# EAGLE board LilyPad-Dev-Simple-Panel-v12 (EAGLE 7.3.0), part 1 of 2
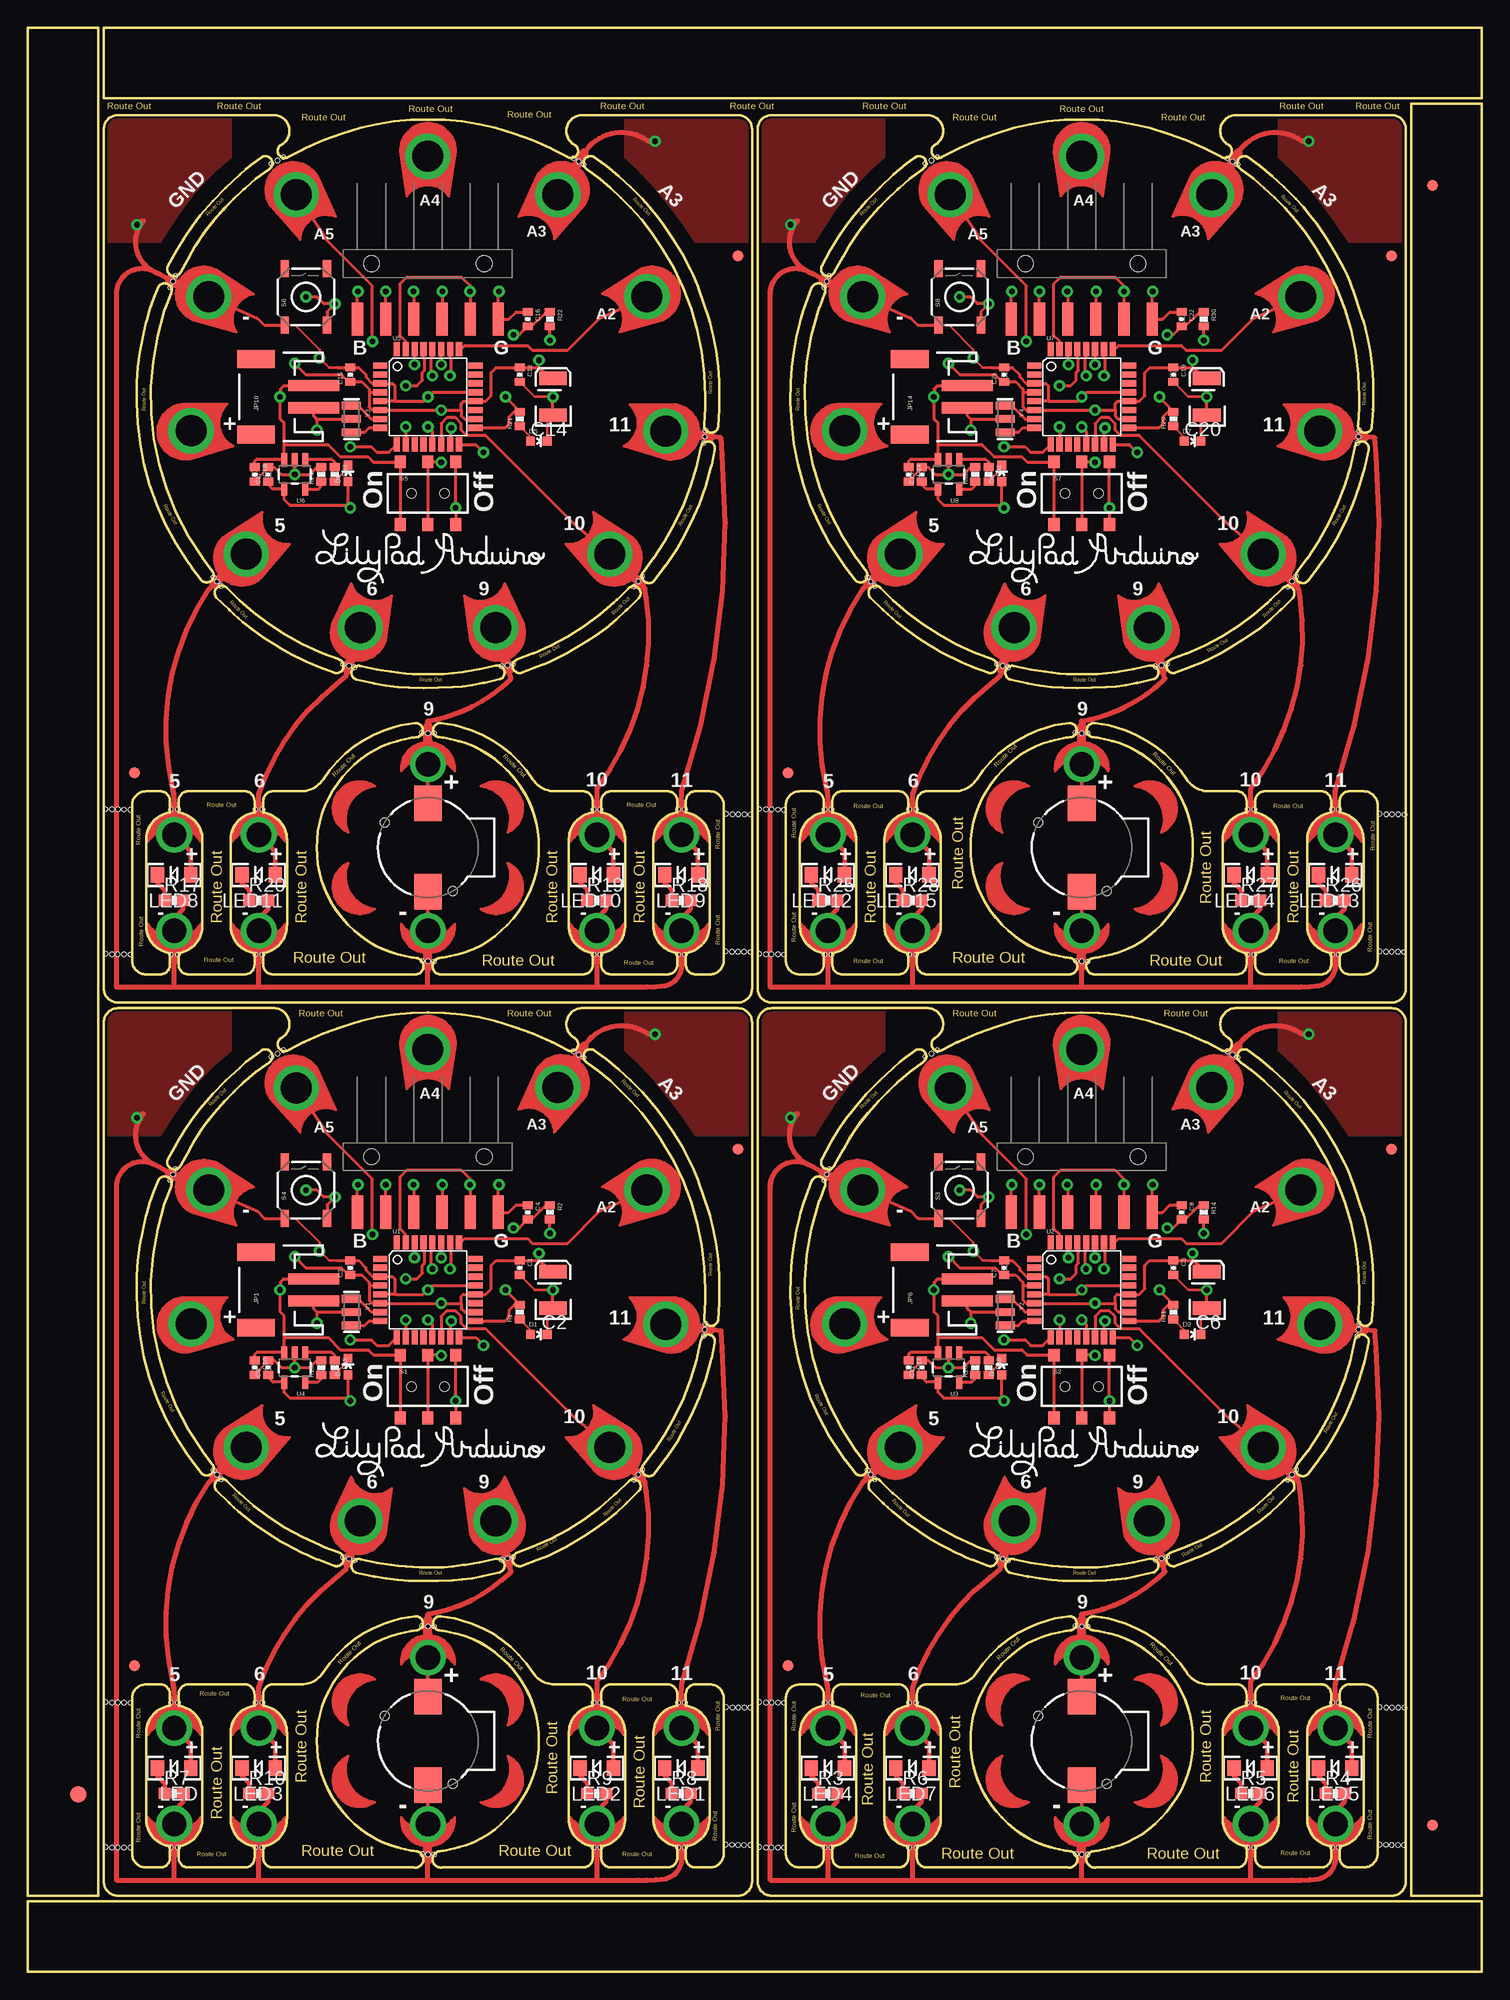
[diagram p0: board, top side]
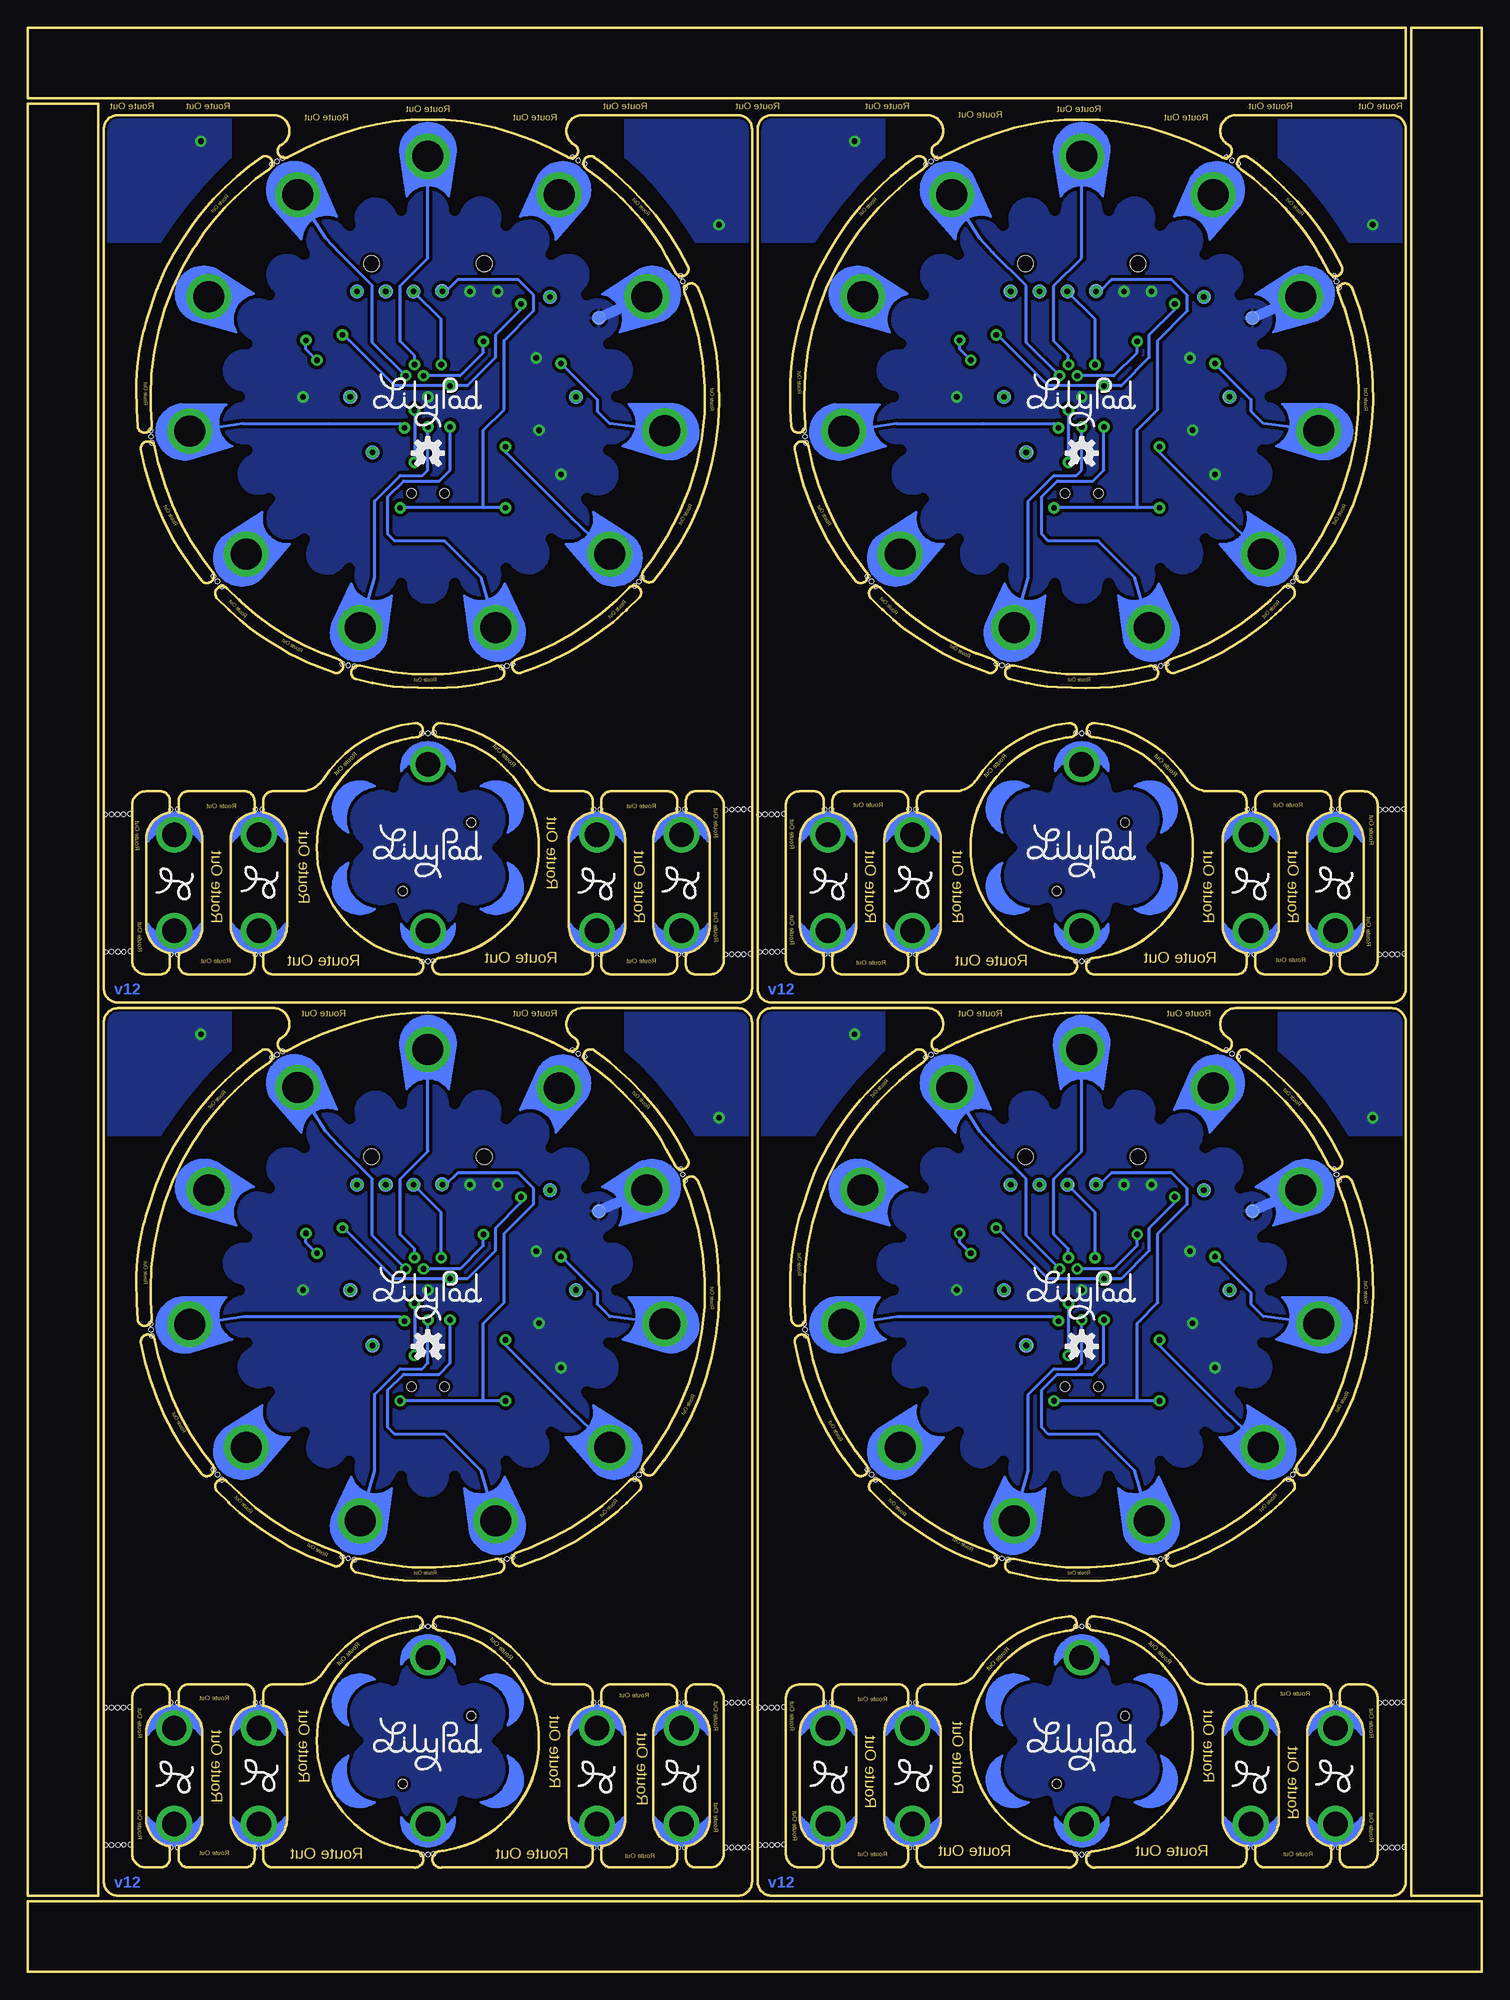
[diagram p1: board, bottom side, seen from below]

Size 131.06 x 175.26 mm. Coordinates in mm from the lower left corner, seen from the top.
Outline: 1254 segments
Copper layers (1*16): Top 0.035mm / dielectric 1.5mm / Bottom 0.035mm
Design rules "default": minimum track width 8mil, minimum drill 20mil, track to track 8mil, track to pad 8mil, pad to pad 8mil, via to via 8mil, smd to smd 8mil, copper to edge 8mil, drill to drill 8mil, minimum pad ring 12mil, minimum via ring 10mil, stop-mask expansion 4mil, vias tented up to drill 20mil, thermal gap 10mil
Net classes: 1 VCC: width 0.203 mm
Holes 0.38 mm at 13.09,71.87 13.31,72.38 12.87,71.34 49.66,82.68 50.12,82.42 49.18,82.98 61.02,57.88 61.08,58.44 60.92,57.32 55.03,44.82 55.38,45.27 54.64,44.36 43.25,37.27 43.76,37.41 42.7,37.16 28.94,37.23 29.44,37.08 28.42,37.37 17.05,44.81 17.42,44.42 16.75,45.21 36.07,31.14 36.61,31.15 35.51,31.17 36.07,10.58 36.6,10.56 35.55,10.6 9.24,24.25 8.69,24.26 8.12,24.27 7.6,24.27 7.01,24.31 9.23,11.19 8.68,11.2 8.12,11.21 7.6,11.21 7.01,11.24 65.15,23.81 64.6,23.82 64.03,23.83 63.52,23.83 62.92,23.86 65.12,11.42 64.57,11.43 64.01,11.44 63.49,11.44 62.89,11.47 22.51,82.77 23.05,83.07 21.96,82.48 13.53,24.27 12.89,24.27 21.15,24.27 20.51,24.27 51.63,24.27 50.99,24.27 59.25,24.27 58.61,24.27 13.53,11.19 12.89,11.19 21.15,11.19 20.51,11.19 51.63,11.19 50.99,11.19 59.25,11.19 58.61,11.19 72.02,71.87 72.24,72.38 71.8,71.34 108.58,82.68 109.05,82.42 108.11,82.98 119.95,57.88 120,58.44 119.85,57.32 113.95,44.82 114.31,45.27 113.57,44.36 102.18,37.27 102.69,37.41 101.63,37.16 87.87,37.23 88.37,37.08 87.35,37.37 75.98,44.81 76.35,44.42 75.68,45.21 94.99,31.14 95.54,31.15 94.44,31.17 95,10.58 95.53,10.56 94.48,10.6 68.17,24.25 67.62,24.26 67.05,24.27 66.53,24.27 65.94,24.31 68.16,11.19 67.61,11.2 67.05,11.21 66.53,11.21 65.93,11.24 124.08,23.81 123.53,23.82 122.96,23.83 122.44,23.83 121.85,23.86 124.05,11.42 123.5,11.43 122.93,11.44 122.42,11.44 121.82,11.47 81.44,82.77 81.98,83.07 80.89,82.48 72.46,24.27 71.82,24.27 80.08,24.27 79.44,24.27 110.56,24.27 109.92,24.27 118.18,24.27 117.54,24.27 72.46,11.19 71.82,11.19 80.08,11.19 79.44,11.19 110.56,11.19 109.92,11.19 118.18,11.19 117.54,11.19 13.09,152.39 13.31,152.9 12.87,151.86 49.66,163.2 50.12,162.94 49.18,163.5 61.02,138.4 61.08,138.95 60.92,137.84 55.03,125.34 55.38,125.79 54.64,124.88 43.25,117.79 43.76,117.93 42.7,117.68 28.94,117.75 29.44,117.6 28.42,117.89 17.05,125.33 17.42,124.94 16.75,125.73 36.07,111.66 36.61,111.67 35.51,111.68 36.07,91.1 36.6,91.08 35.55,91.12 9.24,104.77 8.69,104.78 8.12,104.79 7.6,104.79 7.01,104.82 9.23,91.71 8.68,91.72 8.12,91.72 7.6,91.73 7.01,91.76 65.15,104.33 64.6,104.34 64.03,104.34 63.52,104.35 62.92,104.38 65.12,91.94 64.57,91.95 64.01,91.95 63.49,91.96 62.89,91.99 22.51,163.29 23.05,163.59 21.96,163 13.53,104.79 12.89,104.79 21.15,104.79 20.51,104.79 51.63,104.79 50.99,104.79 59.25,104.79 58.61,104.79 13.53,91.7 12.89,91.7 21.15,91.7 20.51,91.7 51.63,91.7 50.99,91.7 59.25,91.7 58.61,91.7 72.02,152.39 72.24,152.9 71.8,151.86 108.58,163.2 109.05,162.94 108.11,163.5 119.95,138.4 120,138.95 119.85,137.84 113.95,125.34 114.31,125.79 113.57,124.88 102.18,117.79 102.69,117.93 101.63,117.68 87.87,117.75 88.37,117.6 87.35,117.89 75.98,125.33 76.35,124.94 75.68,125.73 94.99,111.66 95.54,111.67 94.44,111.68 95,91.1 95.53,91.08 94.48,91.12 68.17,104.77 67.62,104.78 67.05,104.79 66.53,104.79 65.94,104.82 68.16,91.71 67.61,91.72 67.05,91.72 66.53,91.73 65.93,91.76 124.08,104.33 123.53,104.34 122.96,104.34 122.44,104.35 121.85,104.38 124.05,91.94 123.5,91.95 122.93,91.95 122.42,91.96 121.82,91.99 81.44,163.29 81.98,163.59 80.89,163 72.46,104.79 71.82,104.79 80.08,104.79 79.44,104.79 110.56,104.79 109.92,104.79 118.18,104.79 117.54,104.79 72.46,91.7 71.82,91.7 80.08,91.7 79.44,91.7 110.56,91.7 109.92,91.7 118.18,91.7 117.54,91.7
bRestrict: area 13.5,38.9 to 58.6,84; area 32.1,79.3 to 34.6,80.5; area 42.7,77.8 to 45.5,79.5; area 47.4,74.9 to 50,77.2; area 51.1,70.6 to 53.1,73.4; area 53.3,65.7 to 54.7,68.3; area 53.9,60.4 to 55.1,62.7; area 53.3,54.7 to 54.8,57.4; area 47.4,45.9 to 50.1,48.2; area 42.8,43.5 to 45.6,45.2; area 37.6,42.5 to 40,43.8; area 32.2,42.5 to 34.7,43.8; 80 more areas; 88 lines

## Footprints (pad centres in the part's own frame; a part is rotated, then mirrored left to right if it is on the bottom)
PETAL-LONG-1-2SIDE = drill 2.794 pad 4.064: 1 0.03,0
BUZZER-CCV = smd 3.2 x 2.5: + 4,0; - -4,0 | hole 0.8: -3.9,-2.25; 2.25,3.9
0402-CAP = smd 0.7 x 0.9: 1 -0.65,0; 2 0.65,0
EIA3528 = smd 1.2 x 2.5: A 1.65,0; C -1.65,0
LED-0603 = smd 0.8 x 0.8: A 0,-0.75; C 0,0.75
FIDUCIAL-1.5X3 = smd 1.5 x 1.5: 1 0,0
FIDUCIAL-1X2 = smd 1 x 1: 1 0,0
JST-2-SMD = smd 1 x 4.6: 1 -1,-3.7; 2 1,-3.7 | smd 1.6 x 3.4: NC1 -3.4,1.5; NC2 3.4,1.5
1X06-SMD = smd 1 x 3: 1 -6.35,5; 2 -3.81,5; 3 -1.27,5; 4 1.27,5; 5 3.81,5; 6 6.35,5 | hole 1.4: -5.08,0; 5.08,0
LED-1206 = smd 1.2 x 1.4: A -1.5,0; C 1.5,0
PETAL-SMALL-2SIDE = drill 2.2: 1 0,0
PAD.03X.05 = smd 1.27 x 1.27: P$1 0,0
0402-RES = smd 0.7 x 0.9: 1 -0.65,0; 2 0.65,0
0603-RES = smd 1.1 x 1: 1 -0.85,0; 2 0.85,0
AYZ0202 = smd 1 x 1.15: 1 -2.5,2.825; 2 0,2.825; 3 2.5,2.825; 4 -2.5,-2.825; 5 0,-2.825; 6 2.5,-2.825 | hole 0.85: 1.5,0; -1.5,0
TACTILE_SWITCH_SMD = smd 1.524 x 0.762: 1 -2.54,1.905; 2 2.54,1.905; 3 -2.54,-1.905; 4 2.54,-1.905
TQFP32-08 = smd 1.27 x 0.559: 1 -4.293,2.8; 2 -4.293,2; 3 -4.293,1.2; 4 -4.293,0.4; 5 -4.293,-0.4; 6 -4.293,-1.2; 7 -4.293,-2; 8 -4.293,-2.8; 17 4.293,-2.8; 18 4.293,-2; 19 4.293,-1.2; 20 4.293,-0.4; 21 4.293,0.4; 22 4.293,1.2; 23 4.293,2; 24 4.293,2.8 | smd 0.559 x 1.27: 9 -2.8,-4.293; 10 -2,-4.293; 11 -1.2,-4.293; 12 -0.4,-4.293; 13 0.4,-4.293; 14 1.2,-4.293; 15 2,-4.293; 16 2.8,-4.293; 25 2.8,4.293; 26 2,4.293; 27 1.2,4.293; 28 0.4,4.293; 29 -0.4,4.293; 30 -1.2,4.293; 31 -2,4.293; 32 -2.8,4.293
SOT23-5 = smd 0.55 x 1.2: 1 -0.95,-1.3; 2 0,-1.3; 3 0.95,-1.3; 4 0.95,1.3; 5 -0.95,1.3
RESONATOR-SMD = smd 0.7 x 1.7: 1 -1.2,0; 2 0,0; 3 1.2,0

## Placement (x,y rotation side)
1  SEWTAP-NOHOLE2  [PETAL-NOHOLE-2SIDE]  29.57,17.08 300 top
2  SEWTAP-NOHOLE2  [PETAL-NOHOLE-2SIDE]  29.57,24.58 240 top
3  SEWTAP-NOHOLE2  [PETAL-NOHOLE-2SIDE]  42.56,24.58 120 top
4  SEWTAP-NOHOLE2  [PETAL-NOHOLE-2SIDE]  42.57,17.07 60 top
5  SEWTAP-NOHOLE2  [PETAL-NOHOLE-2SIDE]  88.5,24.58 240 top
6  SEWTAP-NOHOLE2  [PETAL-NOHOLE-2SIDE]  101.49,24.58 120 top
7  SEWTAP-NOHOLE2  [PETAL-NOHOLE-2SIDE]  101.49,17.07 60 top
8  SEWTAP-NOHOLE2  [PETAL-NOHOLE-2SIDE]  88.5,17.08 300 top
9  SEWTAP-NOHOLE2  [PETAL-NOHOLE-2SIDE]  29.57,105.1 240 top
10  SEWTAP-NOHOLE2  [PETAL-NOHOLE-2SIDE]  42.56,105.1 120 top
11  SEWTAP-NOHOLE2  [PETAL-NOHOLE-2SIDE]  42.57,97.59 60 top
12  SEWTAP-NOHOLE2  [PETAL-NOHOLE-2SIDE]  29.57,97.6 300 top
13  SEWTAP-NOHOLE2  [PETAL-NOHOLE-2SIDE]  88.5,105.1 240 top
14  SEWTAP-NOHOLE2  [PETAL-NOHOLE-2SIDE]  101.49,105.1 120 top
15  SEWTAP-NOHOLE2  [PETAL-NOHOLE-2SIDE]  101.49,97.59 60 top
16  SEWTAP-NOHOLE2  [PETAL-NOHOLE-2SIDE]  88.5,97.6 300 top
A2/1  SEWTAP9  [PETAL-LONG-1-2SIDE]  114.77,70.51 204.5 top
A2/2  SEWTAP9  [PETAL-LONG-1-2SIDE]  55.84,151.03 204.5 top
A2/3  SEWTAP9  [PETAL-LONG-1-2SIDE]  114.77,151.03 204.5 top
A2/16  SEWTAP9  [PETAL-LONG-1-2SIDE]  55.84,70.51 204.5 top
A3/1  SEWTAP9  [PETAL-LONG-1-2SIDE]  106.74,79.73 237.3 top
A3/2  SEWTAP9  [PETAL-LONG-1-2SIDE]  47.81,160.25 237.3 top
A3/3  SEWTAP9  [PETAL-LONG-1-2SIDE]  106.74,160.25 237.3 top
A3/17  SEWTAP9  [PETAL-LONG-1-2SIDE]  47.81,79.73 237.3 top
A4/1  SEWTAP9  [PETAL-LONG-1-2SIDE]  95,83.17 270 top
A4/2  SEWTAP9  [PETAL-LONG-1-2SIDE]  36.07,163.69 270 top
A4/3  SEWTAP9  [PETAL-LONG-1-2SIDE]  95,163.69 270 top
A4/18  SEWTAP9  [PETAL-LONG-1-2SIDE]  36.07,83.17 270 top
A5/1  SEWTAP9  [PETAL-LONG-1-2SIDE]  83.13,79.7 302.7 top
A5/2  SEWTAP9  [PETAL-LONG-1-2SIDE]  24.2,160.22 302.7 top
A5/3  SEWTAP9  [PETAL-LONG-1-2SIDE]  83.13,160.22 302.7 top
A5/19  SEWTAP9  [PETAL-LONG-1-2SIDE]  24.2,79.7 302.7 top
B1  Buzzer  [BUZZER-CCV]  36.07,20.83 90 top
B2  Buzzer  [BUZZER-CCV]  95,20.83 90 top
B3  Buzzer  [BUZZER-CCV]  36.07,101.35 90 top
B4  Buzzer  [BUZZER-CCV]  95,101.35 90 top
C1  0.1uF  [0402-CAP]  44.34,63.47 270 top
C2  47uF  [EIA3528]  47.34,61.47 90 top
C3  1.0uF  [0402-CAP]  29.07,63.47 90 top
C4  0.1uF  [0402-CAP]  45.07,68.47 270 top
C5  0.1uF  [0402-CAP]  103.27,63.47 270 top
C6  47uF  [EIA3528]  106.27,61.47 90 top
C7  1.0uF  [0402-CAP]  88,63.47 90 top
C8  0.1uF  [0402-CAP]  104,68.47 270 top
C9  4.7uF  [0402-CAP]  21.67,54.47 90 top
C10  4.7uF  [0402-CAP]  20.47,54.47 270 top
C11  4.7uF  [0402-CAP]  80.6,54.47 90 top
C12  4.7uF  [0402-CAP]  79.4,54.47 270 top
C13  0.1uF  [0402-CAP]  44.34,143.99 270 top
C14  47uF  [EIA3528]  47.34,141.99 90 top
C15  1.0uF  [0402-CAP]  29.07,143.99 90 top
C16  0.1uF  [0402-CAP]  45.07,148.99 270 top
C17  4.7uF  [0402-CAP]  21.67,134.99 90 top
C18  4.7uF  [0402-CAP]  20.47,134.99 270 top
C19  0.1uF  [0402-CAP]  103.27,143.99 270 top
C20  47uF  [EIA3528]  106.27,141.99 90 top
C21  1.0uF  [0402-CAP]  88,143.99 90 top
C22  0.1uF  [0402-CAP]  104,148.99 270 top
C23  4.7uF  [0402-CAP]  80.6,134.99 90 top
C24  4.7uF  [0402-CAP]  79.4,134.99 270 top
D1  Status  [LED-0603]  46.07,57.47 270 top
D2  Status  [LED-0603]  105,57.47 270 top
D3  Yellow  [LED-0603]  87.8,54.57 0 top
D4  Yellow  [LED-0603]  28.87,54.57 0 top
D5  Status  [LED-0603]  46.07,137.99 270 top
D6  Yellow  [LED-0603]  28.87,135.09 0 top
D7  Status  [LED-0603]  105,137.99 270 top
D8  Yellow  [LED-0603]  87.8,135.09 0 top
E$1  [FIDUCIAL-1.5X3]  4.57,16 0 top
E$4  [FIDUCIAL-1X2]  126.62,13.21 0 top
E$5  [FIDUCIAL-1X2]  126.62,161.04 180 top
JP1  LiPo  [JST-2-SMD]  22.07,61.47 90 top
JP2  [1X06-SMD]  36.07,73.47 180 top
JP3  FIDUCIAL1X2  [FIDUCIAL-1X2]  64.01,74.17 0 top
JP4  FIDUCIAL1X2  [FIDUCIAL-1X2]  9.6,27.58 0 top
JP5  [1X06-SMD]  95,73.47 180 top
JP6  LiPo  [JST-2-SMD]  81,61.47 90 top
JP7  FIDUCIAL1X2  [FIDUCIAL-1X2]  122.94,74.17 0 top
JP8  FIDUCIAL1X2  [FIDUCIAL-1X2]  68.53,27.58 0 top
JP9  [1X06-SMD]  36.07,153.99 180 top
JP10  LiPo  [JST-2-SMD]  22.07,141.99 90 top
JP11  FIDUCIAL1X2  [FIDUCIAL-1X2]  64.01,154.69 0 top
JP12  FIDUCIAL1X2  [FIDUCIAL-1X2]  9.6,108.1 0 top
JP13  [1X06-SMD]  95,153.99 180 top
JP14  LiPo  [JST-2-SMD]  81,141.99 90 top
JP15  FIDUCIAL1X2  [FIDUCIAL-1X2]  122.94,154.69 0 top
JP16  FIDUCIAL1X2  [FIDUCIAL-1X2]  68.53,108.1 0 top
LED  White  [LED-1206]  13.19,18.36 180 top
LED1  White  [LED-1206]  58.91,18.36 180 top
LED2  White  [LED-1206]  51.29,18.36 180 top
LED3  White  [LED-1206]  20.81,18.36 180 top
LED4  White  [LED-1206]  72.12,18.36 180 top
LED5  White  [LED-1206]  117.84,18.36 180 top
LED6  White  [LED-1206]  110.22,18.36 180 top
LED7  White  [LED-1206]  79.74,18.36 180 top
LED8  White  [LED-1206]  13.19,98.88 180 top
LED9  White  [LED-1206]  58.91,98.88 180 top
LED10  White  [LED-1206]  51.29,98.88 180 top
LED11  White  [LED-1206]  20.81,98.88 180 top
LED12  White  [LED-1206]  72.12,98.88 180 top
LED13  White  [LED-1206]  117.84,98.88 180 top
LED14  White  [LED-1206]  110.22,98.88 180 top
LED15  White  [LED-1206]  79.74,98.88 180 top
LED+  SEWTAP6  [PETAL-SMALL-2SIDE]  13.21,21.97 180 top
LED+1  SEWTAP6  [PETAL-SMALL-2SIDE]  58.93,21.97 180 top
LED+2  SEWTAP6  [PETAL-SMALL-2SIDE]  51.31,21.97 180 top
LED+3  SEWTAP6  [PETAL-SMALL-2SIDE]  20.83,21.97 180 top
LED+4  SEWTAP6  [PETAL-SMALL-2SIDE]  72.14,21.97 180 top
LED+5  SEWTAP6  [PETAL-SMALL-2SIDE]  117.86,21.97 180 top
LED+6  SEWTAP6  [PETAL-SMALL-2SIDE]  110.24,21.97 180 top
LED+7  SEWTAP6  [PETAL-SMALL-2SIDE]  79.76,21.97 180 top
LED+8  SEWTAP6  [PETAL-SMALL-2SIDE]  13.21,102.49 180 top
LED+9  SEWTAP6  [PETAL-SMALL-2SIDE]  58.93,102.49 180 top
LED+10  SEWTAP6  [PETAL-SMALL-2SIDE]  51.31,102.49 180 top
LED+11  SEWTAP6  [PETAL-SMALL-2SIDE]  20.83,102.49 180 top
LED+12  SEWTAP6  [PETAL-SMALL-2SIDE]  72.14,102.49 180 top
LED+13  SEWTAP6  [PETAL-SMALL-2SIDE]  117.86,102.49 180 top
LED+14  SEWTAP6  [PETAL-SMALL-2SIDE]  110.24,102.49 180 top
LED+15  SEWTAP6  [PETAL-SMALL-2SIDE]  79.76,102.49 180 top
LED-  SEWTAP6  [PETAL-SMALL-2SIDE]  13.21,13.34 0 top
LED-1  SEWTAP6  [PETAL-SMALL-2SIDE]  58.93,13.34 0 top
LED-2  SEWTAP6  [PETAL-SMALL-2SIDE]  51.31,13.34 0 top
LED-3  SEWTAP6  [PETAL-SMALL-2SIDE]  20.83,13.34 0 top
LED-4  SEWTAP6  [PETAL-SMALL-2SIDE]  72.14,13.34 0 top
LED-5  SEWTAP6  [PETAL-SMALL-2SIDE]  117.86,13.34 0 top
LED-6  SEWTAP6  [PETAL-SMALL-2SIDE]  110.24,13.34 0 top
LED-7  SEWTAP6  [PETAL-SMALL-2SIDE]  79.76,13.34 0 top
LED-8  SEWTAP6  [PETAL-SMALL-2SIDE]  13.21,93.85 0 top
LED-9  SEWTAP6  [PETAL-SMALL-2SIDE]  58.93,93.85 0 top
LED-10  SEWTAP6  [PETAL-SMALL-2SIDE]  51.31,93.85 0 top
LED-11  SEWTAP6  [PETAL-SMALL-2SIDE]  20.83,93.85 0 top
LED-12  SEWTAP6  [PETAL-SMALL-2SIDE]  72.14,93.85 0 top
LED-13  SEWTAP6  [PETAL-SMALL-2SIDE]  117.86,93.85 0 top
LED-14  SEWTAP6  [PETAL-SMALL-2SIDE]  110.24,93.85 0 top
LED-15  SEWTAP6  [PETAL-SMALL-2SIDE]  79.76,93.85 0 top
LOGO  LOGO-LPLPA  [LOGO-LPA]  36.07,47.47 0 top
LOGO1  LOGO-LPL  [LOGO-L]  72.21,17.65 90 bottom
LOGO2  LOGO-LPL  [LOGO-L]  117.81,17.55 90 bottom
LOGO3  LOGO-LPL  [LOGO-L]  13.28,17.65 90 bottom
LOGO4  LOGO-LPL  [LOGO-L]  58.88,17.55 90 bottom
LOGO5  LOGO-LPL  [LOGO-L]  51.23,17.7 90 bottom
LOGO6  LOGO-LPL  [LOGO-L]  20.85,17.55 90 bottom
LOGO7  LOGO-LPL  [LOGO-L]  110.16,17.7 90 bottom
LOGO8  LOGO-LPL  [LOGO-L]  79.78,17.55 90 bottom
LOGO9  LOGO-LPLPA  [LOGO-LPA]  95,47.47 0 top
LOGO10  LOGO-LPL  [LOGO-L]  13.28,98.17 90 bottom
LOGO11  LOGO-LPL  [LOGO-L]  58.88,98.07 90 bottom
LOGO12  LOGO-LPL  [LOGO-L]  51.23,98.22 90 bottom
LOGO13  LOGO-LPL  [LOGO-L]  20.85,98.07 90 bottom
LOGO14  LOGO-LPLPA  [LOGO-LPA]  36.07,127.99 0 top
LOGO15  LOGO-LPL  [LOGO-L]  72.21,98.17 90 bottom
LOGO16  LOGO-LPL  [LOGO-L]  117.81,98.07 90 bottom
LOGO17  LOGO-LPL  [LOGO-L]  110.16,98.22 90 bottom
LOGO18  LOGO-LPL  [LOGO-L]  79.78,98.07 90 bottom
LOGO19  LOGO-LPLPA  [LOGO-LPA]  95,127.99 0 top
PP-GND  [PAD.03X.05]  20.67,68.57 0 bottom
PP-GND1  [PAD.03X.05]  79.6,68.57 0 bottom
PP-GND2  [PAD.03X.05]  20.67,149.09 0 bottom
PP-GND3  [PAD.03X.05]  79.6,149.09 0 bottom
PP-MISO  [PAD.03X.05]  41.07,56.47 0 bottom
PP-MISO1  [PAD.03X.05]  100,56.47 0 bottom
PP-MISO2  [PAD.03X.05]  41.07,136.99 0 bottom
PP-MISO3  [PAD.03X.05]  100,136.99 0 bottom
PP-RST  [PAD.03X.05]  25.07,70.47 0 bottom
PP-RST1  [PAD.03X.05]  84,70.47 0 bottom
PP-RST2  [PAD.03X.05]  25.07,150.99 0 bottom
PP-RST3  [PAD.03X.05]  84,150.99 0 bottom
PP-SCK  [PAD.03X.05]  43.07,61.47 0 bottom
PP-SCK1  [PAD.03X.05]  102,61.47 0 bottom
PP-SCK2  [PAD.03X.05]  43.07,141.99 0 bottom
PP-SCK3  [PAD.03X.05]  102,141.99 0 bottom
R1  330  [0402-RES]  44.34,59.47 90 top
R2  10K  [0402-RES]  47.07,68.47 270 top
R3  100  [0603-RES]  72.12,16.08 0 top
R4  100  [0603-RES]  117.84,16.08 0 top
R5  100  [0603-RES]  110.22,16.08 0 top
R6  100  [0603-RES]  79.74,16.08 0 top
R7  100  [0603-RES]  13.19,16.08 0 top
R8  100  [0603-RES]  58.91,16.08 0 top
R9  100  [0603-RES]  51.29,16.08 0 top
R10  100  [0603-RES]  20.81,16.08 0 top
R11  330  [0402-RES]  103.27,59.47 90 top
R12  330  [0402-RES]  27.67,54.47 270 top
R13  10k  [0402-RES]  26.47,54.47 90 top
R14  10K  [0402-RES]  106,68.47 270 top
R15  330  [0402-RES]  86.6,54.47 270 top
R16  10k  [0402-RES]  85.4,54.47 90 top
R17  100  [0603-RES]  13.19,96.6 0 top
R18  100  [0603-RES]  58.91,96.6 0 top
R19  100  [0603-RES]  51.29,96.6 0 top
R20  100  [0603-RES]  20.81,96.6 0 top
R21  330  [0402-RES]  44.34,139.99 90 top
R22  10K  [0402-RES]  47.07,148.99 270 top
R23  330  [0402-RES]  27.67,134.99 270 top
R24  10k  [0402-RES]  26.47,134.99 90 top
R25  100  [0603-RES]  72.12,96.6 0 top
R26  100  [0603-RES]  117.84,96.6 0 top
R27  100  [0603-RES]  110.22,96.6 0 top
R28  100  [0603-RES]  79.74,96.6 0 top
R29  330  [0402-RES]  103.27,139.99 90 top
R30  10K  [0402-RES]  106,148.99 270 top
R31  330  [0402-RES]  86.6,134.99 270 top
R32  10k  [0402-RES]  85.4,134.99 90 top
S1  On/Off  [AYZ0202]  36.07,52.77 0 top
S2  On/Off  [AYZ0202]  95,52.77 0 top
S3  Reset  [TACTILE_SWITCH_SMD]  84,70.47 90 top
S4  Reset  [TACTILE_SWITCH_SMD]  25.07,70.47 90 top
S5  On/Off  [AYZ0202]  36.07,133.29 0 top
S6  Reset  [TACTILE_SWITCH_SMD]  25.07,150.99 90 top
S7  On/Off  [AYZ0202]  95,133.29 0 top
S8  Reset  [TACTILE_SWITCH_SMD]  84,150.99 90 top
TP1  [PAD.03X.05]  34.8,70.99 0 bottom
TP2  [PAD.03X.05]  22.73,61.47 0 bottom
TP3  [PAD.03X.05]  93.73,70.99 0 bottom
TP4  [PAD.03X.05]  81.66,61.47 0 bottom
TP5  [PAD.03X.05]  34.8,151.51 0 bottom
TP6  [PAD.03X.05]  22.73,141.99 0 bottom
TP7  [PAD.03X.05]  93.73,151.51 0 bottom
TP8  [PAD.03X.05]  81.66,141.99 0 bottom
TP-DTR  [PAD.03X.05]  42.47,70.97 0 bottom
TP-DTR1  [PAD.03X.05]  101.4,70.97 0 bottom
TP-DTR2  [PAD.03X.05]  42.47,151.49 0 bottom
TP-DTR3  [PAD.03X.05]  101.4,151.49 0 bottom
TP-RX  [PAD.03X.05]  37.37,70.97 0 bottom
TP-RX1  [PAD.03X.05]  96.3,70.97 0 bottom
TP-RX2  [PAD.03X.05]  37.37,151.49 0 bottom
TP-RX3  [PAD.03X.05]  96.3,151.49 0 bottom
TP-TX  [PAD.03X.05]  39.87,70.97 90 bottom
TP-TX1  [PAD.03X.05]  98.8,70.97 90 bottom
TP-TX2  [PAD.03X.05]  39.87,151.49 90 bottom
TP-TX3  [PAD.03X.05]  98.8,151.49 90 bottom
U1  ATMEGA328  [TQFP32-08]  36.07,61.47 0 top
U2  ATMEGA328  [TQFP32-08]  95,61.47 0 top
U3  MCP73831  [SOT23-5]  83,54.47 180 top
U4  MCP73831  [SOT23-5]  24.07,54.47 180 top
U5  ATMEGA328  [TQFP32-08]  36.07,141.99 0 top
U6  MCP73831  [SOT23-5]  24.07,134.99 180 top
U7  ATMEGA328  [TQFP32-08]  95,141.99 0 top
U8  MCP73831  [SOT23-5]  83,134.99 180 top
U$1  SEWTAP9  [PETAL-LONG-1-2SIDE]  29.96,40.64 73.7 top
U$2  OSHW-LOGOS  [OSHW-LOGO-S]  36.07,56.39 0 bottom
U$3  LOGO-LPLP  [LOGO-LILYPAD]  95,20.83 0 bottom
U$4  SEWTAP9  [PETAL-LONG-1-2SIDE]  57.55,58.38 171.8 top
U$5  SEWTAP9  [PETAL-LONG-1-2SIDE]  88.89,40.64 73.7 top
U$6  SEWTAP9  [PETAL-LONG-1-2SIDE]  101.11,40.64 106.3 top
U$7  SEWTAP9  [PETAL-LONG-1-2SIDE]  111.4,47.26 139.1 top
U$8  SEWTAP9  [PETAL-LONG-1-2SIDE]  78.6,47.26 40.9 top
U$9  SEWTAP9  [PETAL-LONG-1-2SIDE]  75.23,70.5 335.5 top
U$10  SEWTAP9  [PETAL-LONG-1-2SIDE]  73.61,58.39 8.2 top
U$11  SEWTAP9  [PETAL-LONG-1-2SIDE]  116.48,58.38 171.8 top
U$12  LOGO-LPLP  [LOGO-LILYPAD]  95,61.47 0 bottom
U$13  [LILYPAD-BRD-LAYERS-SMALL]  95,20.83 120 top
U$14  OSHW-LOGOS  [OSHW-LOGO-S]  95,56.39 0 bottom
U$15  LOGO-LPLP  [LOGO-LILYPAD]  36.07,101.35 0 bottom
U$16  SEWTAP9  [PETAL-LONG-1-2SIDE]  29.96,121.16 73.7 top
U$17  SEWTAP9  [PETAL-LONG-1-2SIDE]  42.18,121.16 106.3 top
U$18  SEWTAP9  [PETAL-LONG-1-2SIDE]  52.47,127.78 139.1 top
U$19  SEWTAP9  [PETAL-LONG-1-2SIDE]  19.67,127.78 40.9 top
U$20  SEWTAP9  [PETAL-LONG-1-2SIDE]  16.3,151.02 335.5 top
U$21  LOGO-LPLP  [LOGO-LILYPAD]  36.07,61.47 0 bottom
U$22  SEWTAP9  [PETAL-LONG-1-2SIDE]  14.69,138.91 8.2 top
U$23  SEWTAP9  [PETAL-LONG-1-2SIDE]  57.55,138.9 171.8 top
U$24  LOGO-LPLP  [LOGO-LILYPAD]  36.07,141.99 0 bottom
U$25  [LILYPAD-BRD-LAYERS-SMALL]  36.07,101.35 120 top
U$26  OSHW-LOGOS  [OSHW-LOGO-S]  36.07,136.91 0 bottom
U$27  LOGO-LPLP  [LOGO-LILYPAD]  95,101.35 0 bottom
U$28  SEWTAP9  [PETAL-LONG-1-2SIDE]  88.89,121.16 73.7 top
U$29  SEWTAP9  [PETAL-LONG-1-2SIDE]  101.11,121.16 106.3 top
U$30  SEWTAP9  [PETAL-LONG-1-2SIDE]  111.4,127.78 139.1 top
U$31  SEWTAP9  [PETAL-LONG-1-2SIDE]  78.6,127.78 40.9 top
U$32  SEWTAP9  [PETAL-LONG-1-2SIDE]  75.23,151.02 335.5 top
U$32-  SEWTAP6  [PETAL-SMALL-2SIDE]  36.07,13.32 0 top
U$32-1  SEWTAP6  [PETAL-SMALL-2SIDE]  95,13.32 0 top
U$32-2  SEWTAP6  [PETAL-SMALL-2SIDE]  36.07,93.84 0 top
U$32-3  SEWTAP6  [PETAL-SMALL-2SIDE]  95,93.84 0 top
U$33  SEWTAP9  [PETAL-LONG-1-2SIDE]  73.61,138.91 8.2 top
U$33+  SEWTAP6  [PETAL-SMALL-2SIDE]  36.07,28.32 180 top
U$33+1  SEWTAP6  [PETAL-SMALL-2SIDE]  95,28.32 180 top
U$33+2  SEWTAP6  [PETAL-SMALL-2SIDE]  36.07,108.84 180 top
U$33+3  SEWTAP6  [PETAL-SMALL-2SIDE]  95,108.84 180 top
U$34  SEWTAP9  [PETAL-LONG-1-2SIDE]  116.48,138.9 171.8 top
U$35  LOGO-LPLP  [LOGO-LILYPAD]  36.07,20.83 0 bottom
U$36  [LILYPAD-BRD-LAYERS-SMALL]  36.07,20.83 120 top
U$37  SEWTAP9  [PETAL-LONG-1-2SIDE]  42.18,40.64 106.3 top
U$38  LOGO-LPLP  [LOGO-LILYPAD]  95,141.99 0 bottom
U$39  SEWTAP9  [PETAL-LONG-1-2SIDE]  52.47,47.26 139.1 top
U$40  [LILYPAD-BRD-LAYERS-SMALL]  95,101.35 120 top
U$41  SEWTAP9  [PETAL-LONG-1-2SIDE]  19.67,47.26 40.9 top
U$42  OSHW-LOGOS  [OSHW-LOGO-S]  95,136.91 0 bottom
U$43  SEWTAP9  [PETAL-LONG-1-2SIDE]  16.3,70.5 335.5 top
U$45  SEWTAP9  [PETAL-LONG-1-2SIDE]  14.69,58.39 8.2 top
Y1  8MHz  [RESONATOR-SMD]  29.17,59.47 270 top
Y2  8MHz  [RESONATOR-SMD]  88.1,59.47 270 top
Y3  8MHz  [RESONATOR-SMD]  29.17,139.99 270 top
Y4  8MHz  [RESONATOR-SMD]  88.1,139.99 270 top

## Library data of the parts
1-16 A2/1-A2/3 A2/16 A3/1-A3/3 A3/17 A4/1-A4/3 A4/18 A5/1-A5/3 A5/19 LED+ LED+1-LED+15 LED- LED-1-LED-15 LOGO LOGO1-LOGO19 U$1 U$3-U$12 U$15-U$24 U$27-U$32 U$32- U$32-1-U$32-3 U$33 U$33+ U$33+1-U$33+3 U$34 U$35 U$37-U$39 U$41 U$43 U$45 = LilyPad-Wearables
B1-B4 C1-C24 D1-D8 JP1-JP16 PP-GND PP-GND1-PP-GND3 PP-MISO PP-MISO1-PP-MISO3 PP-RST PP-RST1-PP-RST3 PP-SCK PP-SCK1-PP-SCK3 R1-R32 S1-S8 TP1-TP8 TP-DTR TP-DTR1-TP-DTR3 TP-RX TP-RX1-TP-RX3 TP-TX TP-TX1-TP-TX3 U1-U8 U$2 U$14 U$26 U$42 Y1-Y4 = SparkFun
E$1 = SparkFun-Retired
E$4 E$5 = SparkFun-Aesthetics
LED LED1-LED15 = SparkFun-3-2-07
U$13 U$25 U$36 U$40 = Testing

## Nets
A0: U1.23
A1: U1.24
A2: A2/16.1 U1.25
A3: A3/17.1 U1.26
A4: A4/18.1 U1.27
A5: A5/19.1 U1.28
A6: U1.19
A7: U1.22
A8: A2/1.1 U2.25
A9: A3/1.1 U2.26
A10: A4/1.1 U2.27
A11: A5/1.1 U2.28
A12: U2.23
A13: U2.22
A14: U2.19
A15: U2.24
A16: A2/2.1 U5.25
A17: A3/2.1 U5.26
A18: A4/2.1 U5.27
A19: A5/2.1 U5.28
A20: U5.23
A21: U5.22
A22: U5.19
A23: U5.24
A24: A2/3.1 U7.25
A25: A3/3.1 U7.26
A26: A4/3.1 U7.27
A27: A5/3.1 U7.28
A28: U7.23
A29: U7.22
A30: U7.19
A31: U7.24
D1: LED5.A LED+5.1 U2.15 U$11.1
D2: U1.32
D3: U1.1
D4: U1.2
D5: LED+.1 LED.A U1.9 U$41.1
D6: LED3.A LED+3.1 U1.10 U$1.1
D7: U1.11
D8: U1.12
D9: B1.+ U1.13 U$33+.1 U$37.1
D10: LED2.A LED+2.1 U1.14 U$39.1
D11: LED1.A LED+1.1 U1.15 U$4.1
D12: PP-MISO.P$1 U1.16
D13: PP-SCK.P$1 R1.2 U1.17
D14: PP-SCK1.P$1 R11.2 U2.17
D15: LED4.A LED+4.1 U2.9 U$8.1
D16: B2.+ U2.13 U$6.1 U$33+1.1
D17: LED7.A LED+7.1 U2.10 U$5.1
D18: LED6.A LED+6.1 U2.14 U$7.1
D19: U2.32
D20: U2.1
D21: U2.2
D22: U2.12
D23: U2.11
D24: PP-MISO1.P$1 U2.16
D25: LED9.A LED+9.1 U5.15 U$23.1
D26: PP-SCK2.P$1 R21.2 U5.17
D27: LED8.A LED+8.1 U5.9 U$19.1
D28: B3.+ U5.13 U$17.1 U$33+2.1
D29: LED11.A LED+11.1 U5.10 U$16.1
D30: LED10.A LED+10.1 U5.14 U$18.1
D31: U5.32
D32: U5.1
D33: U5.2
D34: U5.12
D35: U5.11
D36: PP-MISO2.P$1 U5.16
D37: LED13.A LED+13.1 U7.15 U$34.1
D38: PP-SCK3.P$1 R29.2 U7.17
D39: LED12.A LED+12.1 U7.9 U$31.1
D40: B4.+ U7.13 U$29.1 U$33+3.1
D41: LED15.A LED+15.1 U7.10 U$28.1
D42: LED14.A LED+14.1 U7.14 U$30.1
D43: U7.32
D44: U7.1
D45: U7.2
D46: U7.12
D47: U7.11
D48: PP-MISO3.P$1 U7.16
DTR: C4.1 JP2.1 TP-DTR.P$1
DTR1: C8.1 JP5.1 TP-DTR1.P$1
DTR2: C16.1 JP9.1 TP-DTR2.P$1
DTR3: C22.1 JP13.1 TP-DTR3.P$1
FTDI_VCC: C9.1 D4.A JP2.4 S1.3 S1.6 TP1.P$1 U4.4
FTDI_VCC1: C11.1 D3.A JP5.4 S2.3 S2.6 TP3.P$1 U3.4
FTDI_VCC2: C17.1 D6.A JP9.4 S5.3 S5.6 TP5.P$1 U6.4
FTDI_VCC3: C23.1 D8.A JP13.4 S7.3 S7.6 TP7.P$1 U8.4
GND [VCC]: B1.- C1.2 C2.C C3.2 C9.2 C10.2 D1.C JP1.1 JP2.5 JP2.6 LED-1.1 LED-2.1 LED-3.1 LED-.1 PP-GND.P$1 R7.2 R8.2 R9.2 R10.2 R13.2 S4.1 U1.3 U1.5 U1.21 U4.2 U$32-.1 U$43.1 Y1.2
GND1 [VCC]: B2.- C5.2 C6.C C7.2 C11.2 C12.2 D2.C JP5.5 JP5.6 JP6.1 LED-4.1 LED-5.1 LED-6.1 LED-7.1 PP-GND1.P$1 R3.2 R4.2 R5.2 R6.2 R16.2 S3.1 U2.3 U2.5 U2.21 U3.2 U$9.1 U$32-1.1 Y2.2
GND2 [VCC]: B3.- C13.2 C14.C C15.2 C17.2 C18.2 D5.C JP9.5 JP9.6 JP10.1 LED-8.1 LED-9.1 LED-10.1 LED-11.1 PP-GND2.P$1 R17.2 R18.2 R19.2 R20.2 R24.2 S6.1 U5.3 U5.5 U5.21 U6.2 U$20.1 U$32-2.1 Y3.2
GND3 [VCC]: B4.- C19.2 C20.C C21.2 C23.2 C24.2 D7.C JP13.5 JP13.6 JP14.1 LED-12.1 LED-13.1 LED-14.1 LED-15.1 PP-GND3.P$1 R25.2 R26.2 R27.2 R28.2 R32.2 S8.1 U7.3 U7.5 U7.21 U8.2 U$32-3.1 U$32.1 Y4.2
N$1: U1.7 Y1.1
N$2: D1.A R1.1
N$3: U1.8 Y1.3
N$4: LED4.C R3.1
N$5: LED5.C R4.1
N$6: LED6.C R5.1
N$7: LED7.C R6.1
N$8: D2.A R11.1
N$10: U2.7 Y2.1
N$11: U2.8 Y2.3
N$12: D3.C R15.2
N$14: LED8.C R17.1
N$15: LED9.C R18.1
N$16: LED10.C R19.1
N$17: LED11.C R20.1
N$18: LED.C R7.1
N$19: D5.A R21.1
N$20: U5.7 Y3.1
N$21: LED1.C R8.1
N$22: U5.8 Y3.3
N$23: D6.C R23.2
N$24: LED2.C R9.1
N$26: LED12.C R25.1
N$27: LED3.C R10.1
N$28: LED13.C R26.1
N$29: LED14.C R27.1
N$30: LED15.C R28.1
N$31: D7.A R29.1
N$32: U7.7 Y4.1
N$33: D4.C R12.2
N$34: U7.8 Y4.3
N$35: D8.C R31.2
PROG: R13.1 U4.5
PROG1: R16.1 U3.5
PROG2: R24.1 U6.5
PROG3: R32.1 U8.5
RST: C4.2 PP-RST.P$1 R2.1 S4.3 U1.29
RST1: C8.2 PP-RST1.P$1 R14.1 S3.3 U2.29
RST2: C16.2 PP-RST2.P$1 R22.1 S6.3 U5.29
RST3: C22.2 PP-RST3.P$1 R30.1 S8.3 U7.29
RXI: JP2.3 TP-RX.P$1 U1.30
RXI1: JP5.3 TP-RX1.P$1 U2.30
RXI2: JP9.3 TP-RX2.P$1 U5.30
RXI3: JP13.3 TP-RX3.P$1 U7.30
STAT: R12.1 U4.1
STAT1: R15.1 U3.1
STAT2: R23.1 U6.1
STAT3: R31.1 U8.1
TXO: JP2.2 TP-TX.P$1 U1.31
TXO1: JP5.2 TP-TX1.P$1 U2.31
TXO2: JP9.2 TP-TX2.P$1 U5.31
TXO3: JP13.2 TP-TX3.P$1 U7.31
VBATT: C10.1 JP1.2 S1.1 S1.4 TP2.P$1 U4.3
VBATT1: C12.1 JP6.2 S2.1 S2.4 TP4.P$1 U3.3
VBATT2: C18.1 JP10.2 S5.1 S5.4 TP6.P$1 U6.3
VBATT3: C24.1 JP14.2 S7.1 S7.4 TP8.P$1 U8.3
VCC [VCC]: C1.1 C2.A C3.1 R2.2 S1.2 S1.5 U1.4 U1.6 U1.18 U1.20 U$45.1
VCC1 [VCC]: C5.1 C6.A C7.1 R14.2 S2.2 S2.5 U2.4 U2.6 U2.18 U2.20 U$10.1
VCC2 [VCC]: C13.1 C14.A C15.1 R22.2 S5.2 S5.5 U5.4 U5.6 U5.18 U5.20 U$22.1
VCC3 [VCC]: C19.1 C20.A C21.1 R30.2 S7.2 S7.5 U7.4 U7.6 U7.18 U7.20 U$33.1